# Altium PCB AT_START_WB415_V1.1.pcbdoc (part 2 of 2)
Units mil, origin at the board's own origin, x right, y up, seen from the top; angles counter-clockwise.
Board outline 4474.57 x 4041.5 mil, 2 copper layers (Top Layer, Bottom Layer); 120 components, 101 nets, 415 pads, 791 vias.
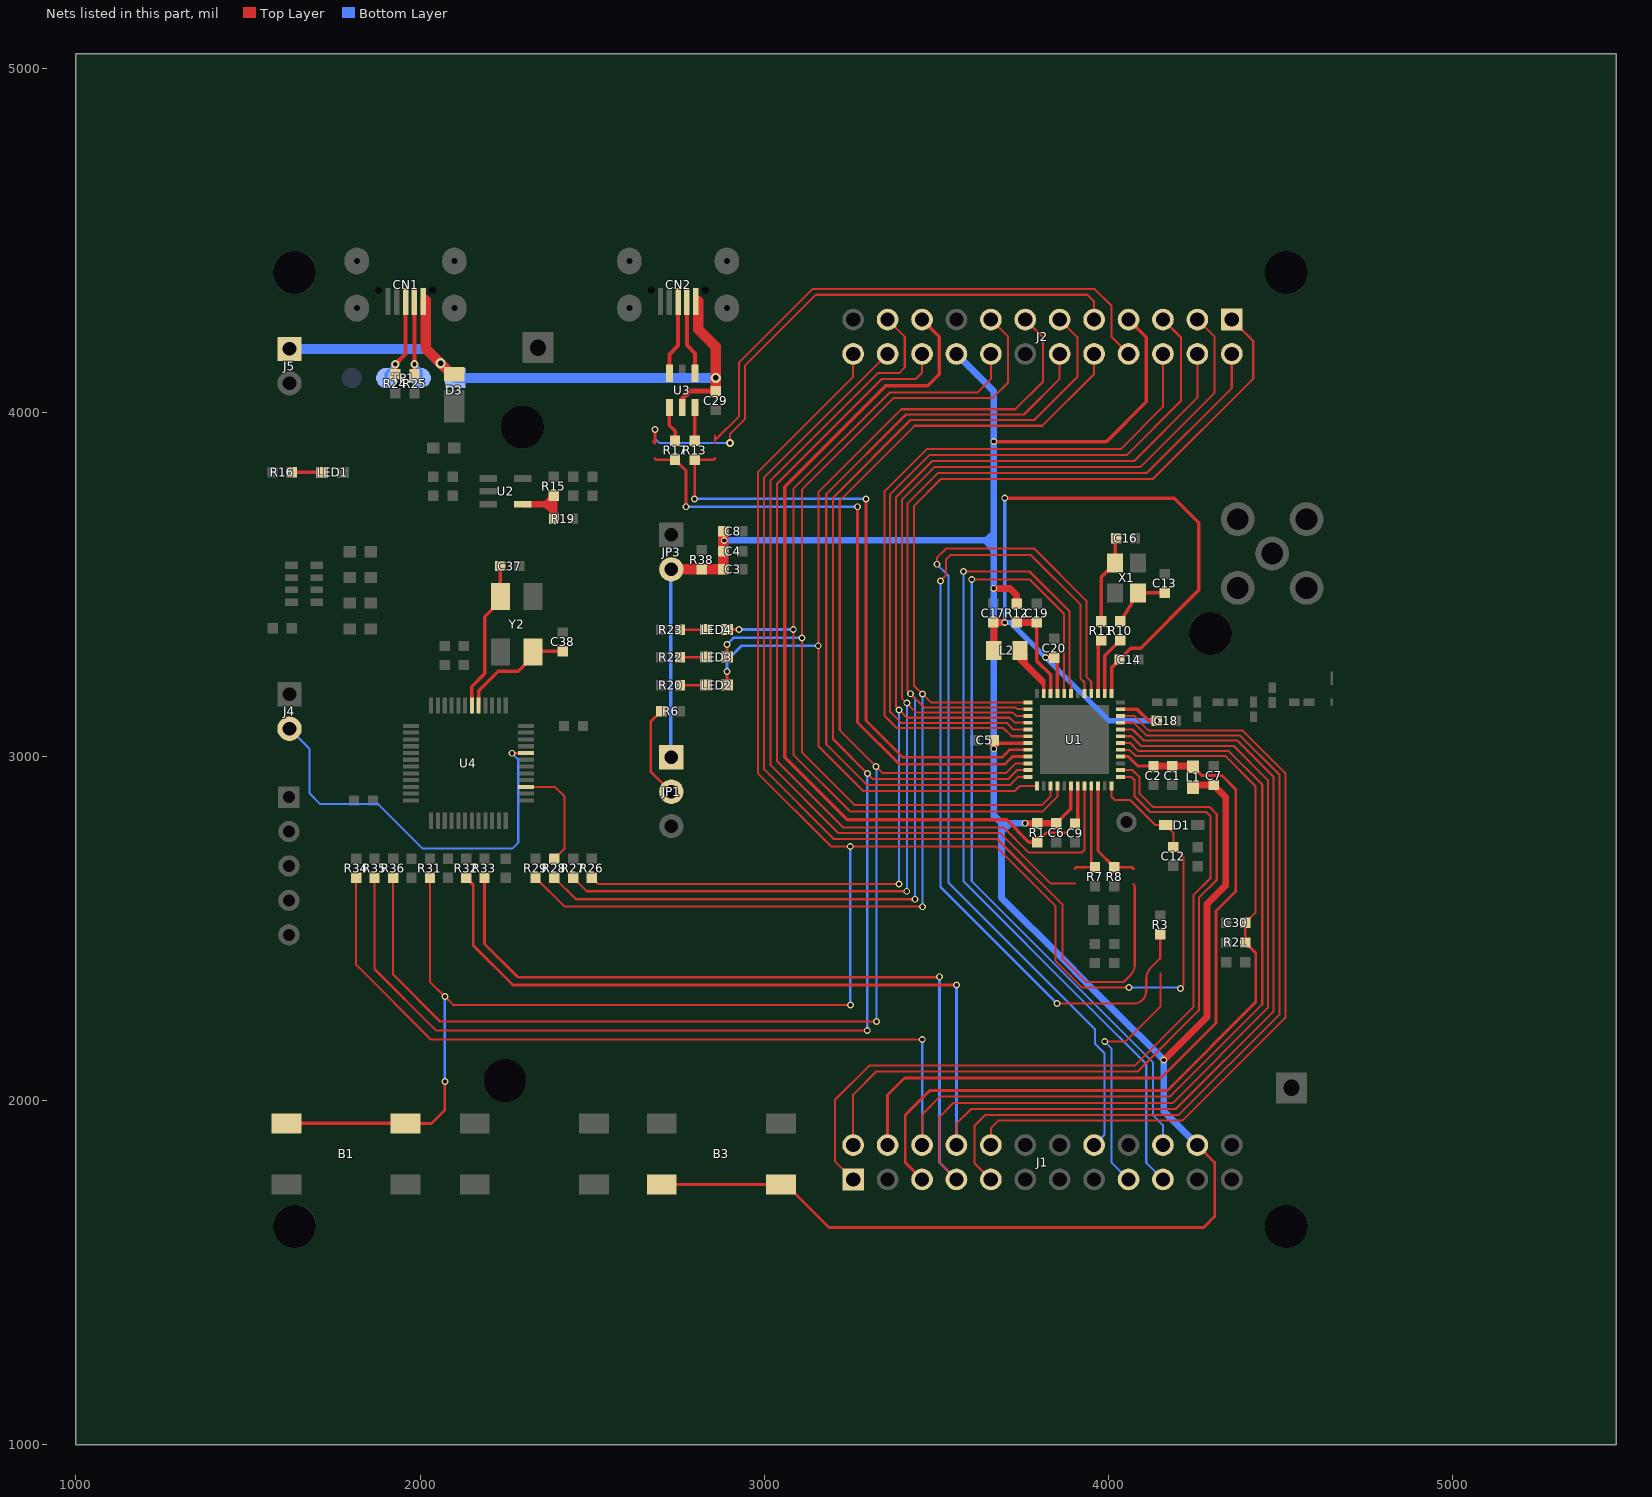
[diagram p2: the nets of this part, all layers, seen from the top]

## Via types
v1: diameter 20, hole 12, Top Layer to Bottom Layer, tented both sides, 769 vias
v2: diameter 24, hole 12, Top Layer to Bottom Layer, tented both sides, 20 vias
v3: diameter 30, hole 16, Top Layer to Bottom Layer, tented both sides, 2 vias

## Nets (pads, with @x,y where several pads share a name; then routed paths per layer and width w, separated by ;. In a path a pad name is that pad's centre, name@x,y a point inside that pad or via, vN(x,y) a via of type N, cw(c..) or ccw(c..) an arc to the next point about the centre after c; other vN are vias at no path point) (continued)
M_SCK: R28.2 U4.39 | length 316.3
  Top Layer w6: U4.39@2307.72,2912.08 2391.59,2912.08 2419.37,2884.3 2419.37,2732.59 R28.2@2390.07,2703.29
MCU_NRST: B1.1 B1.3 C12.2 D1.1 J2.24 R31.1 U1.48 | length 6453.4
  Top Layer w6: R31.1@2028.37,2646.9 2028.37,2346.4 v1(2071.77,2303) 2095.97,2278.8 v1(3249.87,2278.8) ; J2.24@3258.15,4170 3258.16,4103.19 2981.17,3826.2 2981.17,2951.8 3193.77,2739.2 v1(3249.57,2739.2) 3672.57,2739.2 3846.37,2565.4 3846.37,2405.6 3922.37,2329.6 v1(4059.77,2329.6) ; U1.48@4008.94,2915.13 4008.94,2882.63 4017.57,2874 4063.57,2874 4136.57,2801 D1.1@4166.42,2801 4188.57,2778.84 C12.2@4188.57,2737.5 4217.27,2708.8 4217.27,2334.8 v1(4208.67,2326.2)
  Top Layer w8: B1.3@1957.76,1934.14 2032.71,1934.14 2071.67,1973.1 v1(2071.67,2056.3)
  Top Layer w10: B1.1@1611.3,1934.14 B1.3@1957.76,1934.14
  Bottom Layer w6: v1(3249.57,2739.2) 3249.57,2279.1 v1(3249.87,2278.8) ; v1(4059.77,2329.6) 4205.27,2329.6 v1(4208.67,2326.2)
  Bottom Layer w8: v1(2071.67,2056.3) 2071.77,2056.4 v1(2071.77,2303)
P04/BLE_MOSI: J2.4 R26.1 U1.28 | length 3544.3
  Top Layer w6: R26.1@2498.57,2648.29 2517.06,2629.8 v1(3391.57,2629.8) ; U1.28@3766.52,3098.5 3727.07,3098.5 3712.57,3113 3414.47,3113 v1(3391.67,3135.8) 3382.57,3144.9 3382.57,3754 3487.27,3858.7 4074.07,3858.7 4258.15,4042.79 J2.4@4258.15,4170
  Top Layer w8: v1(3391.57,2629.8) 3393.07,2629.8 v1@3394.07,2630.8
  Bottom Layer w6: v1(3391.57,2629.8) 3391.67,2629.9 v1(3391.67,3135.8)
P05/BLE_MISO: J2.3 R27.1 U1.27 | length 3768.4
  Top Layer w6: R27.1@2444.47,2648.29 2483.86,2608.9 v1(3413.67,2608.9) ; U1.27@3766.52,3118.19 3731.38,3118.19 3721.57,3128 3441.37,3128 v1(3413.97,3155.4) 3399.57,3169.8 3399.57,3746 3495.27,3841.7 4093.27,3841.7 4308.57,4057 4308.57,4219.59 J2.3@4258.15,4270
  Bottom Layer w6: v1(3413.67,2608.9) 3413.97,2609.2 v1(3413.97,3155.4)
P06/BLE_SCK: J2.2 R28.1 U1.26 | length 3772.5
  Top Layer w6: R28.1@2390.07,2648.29 2452.86,2585.5 v1(3437.27,2585.5) ; U1.26@3766.52,3137.87 3734.7,3137.87 3729.57,3143 3464.07,3143 v1(3424.47,3182.6) 3416.57,3190.5 3416.57,3736 3504.87,3824.3 4111.97,3824.3 4358.15,4070.49 J2.2@4358.15,4170
  Bottom Layer w6: v1(3424.47,3182.6) 3437.27,3169.8 v1(3437.27,2585.5)
P07/BLE_NSS: J2.1 R29.1 U1.25 | length 3988.6
  Top Layer w6: R29.1@2335.27,2648.29 2419.66,2563.9 v1(3459.57,2563.9) ; U1.25@3766.52,3157.56 3483.71,3157.56 v1(3459.87,3181.4) 3434.57,3206.7 3434.57,3728 3513.07,3806.5 4129.07,3806.5 4420.57,4098 4420.57,4207.59 J2.1@4358.15,4270
  Bottom Layer w6: v1(3459.87,3181.4) 3459.87,2564.2 v1(3459.57,2563.9) v1@3460.57,2563.9
P14: R3.2 U1.17 | length 2615
  Top Layer w6: v1(3511.97,3510.5) 3527.87,3526.4 3527.87,3573.2 3539.97,3585.3 3774.87,3585.3 3919.07,3441.1 3919.07,3226.5 3930.2,3215.37 U1.17@3930.2,3183.44 ; v1(3850.37,2282.7) 4073.52,2282.7 ccw(c4073.52,2318.55) 4098.87,2293.2 ccw(c4072.79,2319.27) 4109.67,2319.27 4109.67,2354.7 cw(c4155.01,2354.7) 4122.95,2386.76 4150.67,2414.48
  Top Layer w8: 4150.67,2414.48 R3.2@4150.67,2483.5
  Bottom Layer w6: v1(3511.97,3510.5) 3511.97,2621.1 v1(3850.37,2282.7)
P14*: J1.17 | length 728.9
  Top Layer w6: v1(3989.17,2171.8) 4048.67,2171.8 4150.67,2273.8 4150.67,2370.08
  Bottom Layer w6: v1(3989.17,2171.8) 4008.47,2152.5 4008.47,1821.14 J1.17@4058.15,1771.46
P16/BLE_TX2: J1.20 U1.20 | length 2414.9
  Top Layer w6: v1(3602.57,3515) 3770.57,3515 3871.14,3414.43 U1.20@3871.14,3183.44
  Bottom Layer w6: v1(3602.57,3515) 3602.57,2638 4129.57,2111 4129.57,1958 4158.15,1929.42 J1.20@4158.15,1871.46
P17/BLE_RX2: J1.19 U1.19 | length 2603
  Top Layer w6: v1(3578.57,3538) 3770.57,3538 3886.57,3422 3886.57,3217.3 3890.83,3213.04 U1.19@3890.83,3183.44
  Bottom Layer w6: v1(3578.57,3538) 3578.57,2638 3950.31,2266.26 4109.57,2107 4109.57,1910.62 4109.57,1820.04 J1.19@4158.15,1771.46
P31: J1.16 U1.16 | length 2704.1
  Top Layer w6: v1(3501.27,3559) 3501.27,3577.6 3528.27,3604.6 3783.97,3604.6 3935.57,3453 3935.57,3232 3949.88,3217.69 U1.16@3949.88,3183.44
  Bottom Layer w6: v1(3501.27,3559) 3535.57,3524.7 3535.57,2632.7 3960.67,2207.6 3960.67,2165.9 3988.27,2138.3 3988.27,1901.58 J1.16@3958.15,1871.46
PA0: C30.2 J1.5 R21.1 U1.5 | length 2449.3
  Top Layer w6: U1.5@4034.82,3019.76 4060.81,3019.76 4078.57,3002 4339.17,3002 4426.57,2914.6 4426.57,2546.1 C30.2@4398.17,2517.7
  Top Layer w8: J1.5@3458.15,1771.46 3409.47,1820.14 3409.47,1958.8 3480.67,2030 4171.07,2030 4427.87,2286.8 4427.87,2429.4 R21.1@4397.27,2460 C30.2@4397.27,2517.7
PA1: J1.6 R34.1 U1.6 | length 4605.7
  Top Layer w6: R34.1@1813.97,2648.7 1813.97,2395 2030.77,2178.2 v1(3458.77,2178.2) ; J1.6@3458.15,1871.46 3458.15,1959.78 3511.37,2013 4179.57,2013 4446.67,2280.1 4446.67,2918.9 4349.57,3016 4086.57,3016 4063.12,3039.45 U1.6@4034.82,3039.45
  Bottom Layer w8: J1.6@3458.57,1871 3458.77,1871.2 v1(3458.77,2178.2)
PA2/MCU_TX2: J1.7 R33.1 U1.7 | length 4595.7
  Top Layer w6: J1.7@3558.15,1771.46 3509.27,1820.34 3509.27,1954.1 3548.17,1993 3616,1993 4186.27,1993 4463.07,2269.8 4463.07,2931.3 4363.47,3030.9 4095.07,3030.9 4066.84,3059.13 U1.7@4034.82,3059.13
  Top Layer w8: R33.1@2186.87,2648.3 2186.87,2455.8 2283.57,2359.1 3509.07,2359.1 v1(3509.07,2360.5)
  Bottom Layer w8: v1(3509.07,2360.5) 3509.07,1820.54 J1.7@3558.15,1771.46
PA3/MCU_RX2: J1.8 R32.1 U1.8 | length 4422.9
  Top Layer w6: J1.8@3558.15,1871.46 3558.15,1932.88 3601.37,1976.1 4195.17,1976.1 4479.67,2260.6 4479.67,2940.7 4373.67,3046.7 4101.97,3046.7 4069.85,3078.82 U1.8@4034.82,3078.82
  Top Layer w8: R32.1@2133.57,2648.3 2154.17,2627.7 2154.17,2451.2 2269.17,2336.2 v1(3558.17,2336.2)
  Bottom Layer w8: J1.8@3558.15,1871.46 v1(3558.17,2336.2)
PA4: J1.9 U1.9 | length 2414.5
  Top Layer w6: J1.9@3658.15,1771.46 3610.57,1819.04 3610.57,1927 3642.57,1959 4204.57,1959 4497.07,2251.5 4497.07,2946.5 4382.57,3061 4110.57,3061 4073.26,3098.31 U1.9@4036.57,3098.31
PA5: J1.10 U1.10 | length 2295.4
  Top Layer w6: J1.10@3658.15,1871.46 3658.15,1919.78 3681.47,1943.1 4215.57,1943.1 4513.67,2241.2 4513.67,2951.9 4390.07,3075.5 4117.07,3075.5 4074.38,3118.19 U1.10@4034.82,3118.19
PA11*: J2.8 | length 1636.8
  Top Layer w6: 2856.57,3932.77 2856.57,3910.77 2856.57,3919 2926.57,3989 2926.57,4145.7 3139.37,4358.5 3960.17,4358.5 4008.57,4310.1 4008.57,4219.59 J2.8@4058.15,4170
PA11/USB_D-: R13.1 U1.32 | length 1840.3
  Top Layer w8: v1(2797.57,3749) R13.1@2797.57,3862.5 2852.7,3862.5 2856.57,3866.37 ; v1(3295.57,3749) 3295.57,3105.2 3402.77,2998 3690.57,2998 3712.33,3019.76 U1.32@3766.52,3019.76
  Bottom Layer w8: v1(2797.57,3749) v1(3295.57,3749)
PA12*: J2.9 | length 1698.8
  Top Layer w6: v2(2900.57,3911) 2900.57,3937.6 2943.57,3980.6 2943.57,4136 3149.57,4342 3938.57,4342 3958.16,4322.41 J2.9@3958.15,4270
  Top Layer w8: 2678.34,3915 2682.57,3910.77 ; 2682.57,3910.78 v1(2682.57,3950.5)
  Bottom Layer w6: v1(2682.57,3950.5) 2682.57,3924 2695.57,3911 v2(2900.57,3911)
PA12/USB_D+: R17.1 U1.33 | length 1889.4
  Top Layer w8: 2682.57,3866.38 2686.45,3862.5 R17.1@2740.57,3862.5 2772.57,3830.5 v1(2772.57,3726) ; v1(3270.57,3726) 3270.57,3099.3 3391.87,2978 3699.57,2978 3721.65,3000.08 U1.33@3766.52,3000.07
  Bottom Layer w8: v1(2772.57,3726) v1(3270.57,3726)
PA13/SWDIO: J2.10 R36.1 U1.34 | length 4709.6
  Top Layer w6: R36.1@1921.37,2648.3 1921.37,2366.9 2057.77,2230.5 v1(3325.67,2230.5) ; U1.34@3766.52,2980.39 3729.96,2980.39 3702.57,2953 3342.87,2953 3219.17,3076.7 3219.17,3743.8 3436.67,3961.3 3807.67,3961.3 3958.16,4111.79 J2.10@3958.15,4170
  Bottom Layer w6: v1(3324.97,2971) 3325.67,2970.3 v1(3325.67,2230.5)
PA14/SWCLK: J2.11 R35.1 U1.35 | length 4889.7
  Top Layer w6: R35.1@1867.47,2648.4 1867.47,2382.9 2046.67,2203.7 v1(3298.97,2203.7) ; U1.35@3766.52,2960.7 3734.28,2960.71 3708.57,2935 3315.57,2935 3199.47,3051.1 3199.47,3752.7 3424.67,3977.9 3784.57,3977.9 3909.57,4102.9 3909.57,4218.59 J2.11@3858.15,4270
  Bottom Layer w6: v1(3298.97,2203.7) 3298.97,2950.4 v1(3299.57,2951)
PB6/PC12: J2.12 U1.36 | length 2261.1
  Top Layer w6: U1.36@3766.52,2941.02 3737.59,2941.02 3714.57,2918 3297.37,2918 3179.97,3035.4 3179.97,3762.3 3411.57,3993.9 3754.47,3993.9 3858.16,4097.59 J2.12@3858.15,4170
PB7: J2.13 LED2.2 U1.37 | length 2775.3
  Top Layer w6: J2.13@3758.15,4270 3809.57,4218.59 3809.57,4089.4 3729.37,4009.2 3398.27,4009.2 3156.87,3767.8 3156.87,3030.7 3287.57,2900 3727.57,2900 3742.71,2915.14 U1.37@3792.4,2915.13
  Top Layer w7.87: v1(2891.27,3247.2) LED2.2@2891.53,3207.9
  Bottom Layer w7.87: v1(2891.27,3247.2) 2891.27,3279.4 2893.97,3282.1 2933.97,3322.1 v1(3156.57,3322.1)
PB8: J2.15 LED3.2 U1.39 | length 2784.5
  Top Layer w6: J2.15@3658.15,4270 3708.57,4219.59 3708.57,4087 3663.97,4042.4 3376.47,4042.4 3109.27,3775.2 3109.27,3012.8 3263.07,2859 3805.87,2859 3831.77,2884.9 U1.39@3831.77,2915.13
  Top Layer w7.87: v1(2891.37,3326) LED3.2@2891.53,3289
  Bottom Layer w7.87: v1(2891.37,3326) 2910.37,3345 v1(3109.07,3345)
PB9: J2.16 LED4.2 U1.40 | length 2629.1
  Top Layer w6: J2.16@3658.15,4170 3658.16,4096.59 3619.87,4058.3 3365.07,4058.3 3084.57,3777.8 3084.57,3005.9 3250.47,2840 3807.87,2840 3851.46,2883.59 U1.40@3851.46,2915.13
  Top Layer w7.87: LED4.2@2891.53,3368.9 2891.93,3369.3 v1(2926.27,3369.3)
  Bottom Layer w7.87: v1(2926.27,3369.3) 3083.77,3369.3 v1(3084.17,3368.9)
PB14: J2.5 U1.29 | length 2269.6
  Top Layer w6: U1.29@3766.52,3078.82 3723.75,3078.82 3704.57,3098 3397.57,3098 3365.57,3130 3365.57,3762 3479.57,3876 4052.67,3876 4210.57,4033.9 4210.57,4217.59 J2.5@4158.15,4270
PB15/PA8: J2.6 U1.30 | length 2158.4
  Top Layer w6: U1.30@3766.52,3059.13 3718.44,3059.13 3694.57,3083 3384.57,3083 3349.57,3118 3349.57,3771 3472.07,3893.5 4035.57,3893.5 4158.15,4016.09 J2.6@4158.15,4170
PC0: J1.1 U1.1 | length 2318
  Top Layer w6: J1.1@3258.15,1771.46 3204.77,1824.84 3204.77,2002.2 3304.57,2102 4076.57,2102 4247.57,2273 4247.57,2598.4 4296.57,2647.4 4296.57,2826 4283.57,2839 4121.57,2839 4075.57,2885 4075.57,2932 4066.55,2941.02 U1.1@4034.82,2941.02
PC1: J1.2 U1.2 | length 2205.1
  Top Layer w6: J1.2@3258.15,1871.46 3258.15,2018.08 3325.07,2085 4085.07,2085 4262.57,2262.5 4262.57,2589.5 4314.57,2641.5 4314.57,2833 4293.57,2854 4128.57,2854 4090.57,2892 4090.57,2940 4069.86,2960.71 U1.2@4034.82,2960.7
PC13: J2.20 U1.44 | length 2608.8
  Top Layer w6: J2.20@3458.15,4170 3458.16,4115.79 3439.27,4096.9 3340.37,4096.9 3036.77,3793.3 3036.77,2986.5 3228.67,2794.6 3694.97,2794.6 3768.77,2720.8 3921.67,2720.8 3930.2,2729.33 U1.44@3930.2,2915.13
PC14*: J2.21 | length 2540.4
  Top Layer w6: J2.21@3358.15,4270 3408.07,4220.09 3408.07,4130.9 3391.57,4114.4 3329.87,4114.4 3018.17,3802.7 3018.17,2974.9 3215.47,2777.6 3684.97,2777.6 3831.85,2630.72 3902.57,2630.72
PC14/LEXT_IN: R7.1 U1.45 | length 313.8
  Top Layer w8: 3902.57,2675.12 3905.95,2678.5 R7.1@3960.57,2678.5 ; U1.45@3949.88,2915.13 3949.88,2689.18 R7.1@3960.57,2678.5 ; R7.1@3951.88,2688.19 3960.57,2679.5 R7.1@3960.57,2678.5
PC15*: J2.22 | length 3045.5
  Top Layer w6: J2.22@3358.15,4170 2999.57,3811.41 2999.57,2962.8 3201.77,2760.6 3676.07,2760.6 3866.57,2570.1 3866.57,2412.5 3933.37,2345.7 4044.87,2345.7 4064.57,2365.6 ; 4064.24,2365.29 ccw(c4035.93,2393.6) 4075.97,2393.6 ; 4072.57,2629.71 cw(c4063.88,2621.02) 4076.17,2621.02 4076.17,2399.55 4076.17,2393.58
PC15/LEXT_OUT: R8.1 U1.46 | length 313.9
  Top Layer w8: U1.46@3969.57,2915.13 3969.57,2725.49 R8.1@4016.57,2678.5 4068.18,2678.5 4072.57,2674.11
R6_1: JP1.2 R6.1 | length 270.5
  Top Layer w7.87: R6.1@2700.08,3131.7 2669.67,3101.29 2669.67,2956.8 JP1.2@2728.37,2898.1
R16_2: LED1.1 R16.2 | length 87.7
  Top Layer w10: R16.2@1627.17,3826.4 LED1.1@1714.83,3825.6
R19_2: R15.1 R19.2 U2.4 | length 221.4
  Top Layer w20: U2.4@2298.07,3733.1 2363.76,3733.1 ; 2363.76,3733.1 R15.1@2388.47,3757.8 R19.2@2388.97,3690.8 2388.57,3712 2363.76,3733.1
R20_1: LED2.1 R20.1 | length 75.5
  Top Layer w7.87: R20.1@2755.08,3207.7 LED2.1@2830.53,3207.9
R22_1: LED3.1 R22.1 | length 75.5
  Top Layer w7.87: R22.1@2755.08,3288.8 LED3.1@2830.53,3289
R23_1: LED4.1 R23.1 | length 75.5
  Top Layer w7.87: R23.1@2755.08,3368.7 LED4.1@2830.53,3368.9
U1_23: L2.1 U1.23 | length 200.8
  Top Layer w10: 3759.9,3266.53 L2.1@3759.9,3295.67 ; 3799.05,3220.16 3811.87,3207.4 ; 3807.07,3219.3 3811.87,3214.2 U1.23@3812.09,3183.44
  Top Layer w20: L2.1@3742.91,3308.5 3742.91,3283.46 3807.07,3219.3
U3_1: CN2.2 U3.1 | length 218.5
  Top Layer w12: CN2.2@2775.16,4322.6 2775.16,4195.41 2798.97,4171.6 U3.1@2798.97,4114
U3_3: CN2.3 U3.3 | length 219.1
  Top Layer w12: U3.3@2724.17,4114 2724.17,4168.6 2749.57,4194 CN2.3@2749.57,4322.6
U3_4: R17.2 U3.4 | length 103.3
  Top Layer w10: U3.4@2724.17,4014 2724.17,3962.4 2740.57,3946 R17.2@2740.57,3917.5
U3_6: R13.2 U3.6 | length 97.1
  Top Layer w10: R13.2@2797.57,3917.5 2797.57,4012.6 U3.6@2798.97,4014
U4_5: C38.1 U4.5 Y2.1 | length 342.8
  Top Layer w10: U4.5@2169.93,3148.3 2169.9,3191.58 2226.32,3248 2285.37,3248 2327.37,3290 Y2.1@2327.38,3303.79 2329.39,3305.81 C38.1@2413.97,3305.8
U4_6: C37.2 U4.6 Y2.3 | length 439.8
  Top Layer w10: U4.6@2150.24,3148.3 2150.21,3203.39 2188.27,3241.45 2188.27,3406.8 2232.89,3451.42 Y2.3@2232.89,3465.21 C37.2@2232.95,3553.79
U4_44: J4.2 U4.44 | length 1200.3
  Top Layer w8: v1(2266.57,3009.8) 2307.03,3009.8 U4.44@2307.73,3010.5
  Bottom Layer w6: J4.2@1620.37,3081.1 1678.47,3023 1678.47,2893.4 1710.17,2861.7 1878.37,2861.7 2006.57,2733.5 2268.57,2733.5 2285.07,2750 2285.07,2991.3 v1(2266.57,3009.8)
USB+: CN1.3 R24.1 TP1.3 | length 275.4
  Top Layer w12: R24.1@1927.57,4110.5 v2(1927.57,4140) 1957.76,4170.19 CN1.3@1957.75,4322.6
  Bottom Layer w10: TP1.3@1901.57,4100 1901.57,4114 v2(1927.57,4140)
USB-: CN1.2 R25.1 TP1.2 | length 259
  Top Layer w12: CN1.2@1983.34,4322.6 R25.1@1983.57,4111.1
  Bottom Layer w10: v2(1983.57,4140) 2001.57,4122 TP1.2@2001.57,4100
VBAT: C9.1 J2.19 R1.1 U1.43 | length 2645.6
  Top Layer w8: R1.1@3792.57,2751.5 3820.07,2779 3876.07,2779 C9.1@3902.57,2805.5
  Top Layer w10: J2.19@3458.15,4270 3508.57,4219.59 3508.57,4110.9 3475.27,4077.6 3352.57,4077.6 3059.17,3784.2 3059.17,2997.6 3240.67,2816.1 3703.97,2816.1 3768.57,2751.5 R1.1@3792.57,2751.5 ; U1.43@3910.51,2915.13 3910.51,2813.44 C9.1@3902.57,2805.5 3903.57,2805.5 C9.1@3912.51,2814.44
VBUS: C29.2 CN1.1 CN2.1 D3.2 J5.1 TP1.1 U3.5 | length 1944
  Top Layer w15: U3.5@2761.57,4014 2761.57,4039.5 2784.07,4062 C29.2@2858.87,4062
  Top Layer w30: CN1.1@2016.17,4326.9 2016.17,4185.7 v3(2059.17,4142.7) 2090.62,4111.25 D3.2@2099.52,4111.25 ; CN2.1@2808.07,4323.9 2808.07,4241.2 2858.87,4190.4 C29.2@2858.87,4062
  Bottom Layer w30: J5.1@1620.37,4184.4 2017.17,4184.4 TP1.1@2101.57,4100 v3@2858.97,4100
  other v3: 2858.87,4100.1
VCC_1V5: C14.2 C17.2 C18.1 C20.2 L2.2 U1.11 U1.13 U1.21 | length 2498.1
  Top Layer w10: v1(3698.57,3751) 4190.57,3751 4262.57,3679 4262.57,3484 4093.57,3315 4065.07,3315 C14.2@4032.07,3282 4008.94,3258.87 U1.13@4008.94,3183.44 ; C20.2@3842.57,3287.5 3851.46,3278.61 U1.21@3851.46,3183.44 ; U1.11@4034.82,3137.87 4082.7,3137.87 4116.57,3104 v1(4139.57,3104)
  Top Layer w15: v1(3817.57,3288) 3842.07,3288 C20.2@3842.57,3287.5
  Top Layer w20: L2.2@3666.83,3308.5 3666.83,3388.24 C17.2@3665.57,3389.5 3698.07,3389.5 v1(3698.57,3390)
  Bottom Layer w10: v1(3698.57,3390) v1(3698.57,3751)
  Bottom Layer w15: v1(3698.57,3390) 3715.57,3390 v1(3817.57,3288) 4001.57,3104 v1(4139.57,3104)
VDD: B3.1 B3.3 C3.1 C4.1 C5.1 C6.1 C7.1 C8.1 J1.22 J2.7 J2.18 JP1.1 JP3.2 L1.1 R1.2 R12.1 R38.2 U1.31 U1.42 | length 8421.8
  Top Layer w7.87: B3.3@2701.84,1757.02 B3.1@3048.29,1757.02 3062.46,1757.01 3187.87,1631.6 4276.67,1631.6 4308.37,1663.3 4308.37,1821.24 J1.22@4258.15,1871.46
  Top Layer w10: v1(3666.67,3915.1) 3994.17,3915.1 4109.57,4030.5 4109.57,4218.59 J2.7@4058.15,4270 ; C5.1@3667.07,3048 3667.07,3023.5 v1(3666.57,3023) 3683.02,3039.45 U1.31@3766.52,3039.45 ; C6.1@3848.57,2806.5 3890.83,2848.76 U1.42@3890.83,2915.13
  Top Layer w20: v1(3666.57,3023) 3666.57,3047.5 C5.1@3667.07,3048 ; v1(3666.57,3489) 3713.57,3489 3732.57,3470 R12.1@3732.57,3444.5 ; v1(3757.57,2806.5) R1.2@3792.57,2806.5 C6.1@3848.57,2806.5 ; v1(4160.57,2118) 4286.57,2244 4286.57,2572 4340.57,2626 4340.57,2882.5 C7.1@4305.57,2917.5 4253.38,2917.5 L1.1@4245.57,2909.69
  Top Layer w30: JP3.2@2729.87,3544.1 R38.2@2817.77,3544.7 C3.1@2878.27,3544.7 ; C3.1@2881.02,3544.7 C8.1@2881.02,3654.5
  Bottom Layer w10: JP1.1@2728.37,2998.1 2728.37,3542.6 JP3.2@2729.87,3544.1
  Bottom Layer w20: v1(2883.47,3627.8) 2884.37,3628.7 3665.67,3628.7 ; J2.18@3558.15,4170 3666.67,4061.49 v1(3666.67,3915.1) 3666.57,3915 v1(3666.57,3489) v1(3666.57,3023) 3666.57,2829 3689.07,2806.5 ; 3643.97,3626.9 3666.55,3600.4 ; 3643.97,3627.75 3666.56,3648.25 ; 3689.07,2782.72 3713.57,2806.5 3713.86,2806.5 ; v1(3757.57,2806.5) 3689.07,2806.5 ; J1.22@4258.15,1871.46 4160.57,1969.04 v1(4160.57,2118) 4011.81,2266.76 3787.31,2491.26 3773.67,2504.9 3773.67,2505.3 3689.07,2589.9 3689.07,2806.5
VDDA: C1.2 C2.2 J1.4 L1.2 U1.4 | length 2278.2
  Top Layer w8: J1.4@3358.15,1871.46 3358.15,2016.58 3407.57,2066 4152.57,2066 4312.57,2226 4312.57,2550.9 4369.57,2607.9 4369.57,2905.1 4329.67,2945 4270.89,2945 L1.2@4245.57,2970.32 L1.2@4243.39,2972.5 ; U1.4@4034.82,3000.07 4057.49,3000.08 4085.07,2972.5 C2.2@4130.57,2972.5
  Top Layer w10: C2.2@4122.07,2981 C2.2@4130.57,2972.5
  Top Layer w20: C2.2@4130.57,2972.5 C1.2@4185.57,2972.5 4243.39,2972.5 L1.2@4245.57,2970.32
VDDBAT: C19.1 R12.2 U1.22 | length 280.7
  Top Layer w10: C19.1@3791.57,3389.5 3791.57,3277.8 3831.77,3237.6 U1.22@3831.77,3183.44
  Top Layer w20: R12.2@3733.57,3389.5 C19.1@3791.57,3389.5
X1_1: C13.2 R10.2 X1.1 | length 175
  Top Layer w10: R10.2@4034.57,3393 X1.1@4086.03,3475.69 4163.38,3475.69 C13.2@4163.57,3475.5
X1_3: C16.2 R11.2 X1.3 | length 258.5
  Top Layer w10: R11.2@3978.57,3393.5 3978.57,3521.78 X1.3@4019.1,3562.31 4019.1,3631.03 C16.2@4022.07,3634
XTALI: R11.1 U1.15 | length 158.3
  Top Layer w10: U1.15@3969.57,3183.44 3969.57,3329 R11.1@3978.57,3338
XTALO: R10.1 U1.14 | length 173.3
  Top Layer w10: U1.14@3989.25,3183.44 3989.25,3292.68 R10.1@4034.57,3338
pads on no net: CN1.4 CN1.MH1 CN1.MH2 CN2.4 CN2.MH1 CN2.MH2 J1.11 J1.12 J1.13 J1.14 J1.15 J1.21 J1.23 J2.23 U4.2 U4.3 U4.4 U4.14 U4.15 U4.16 U4.17 U4.18 U4.21 U4.22 U4.42 U4.43 U4.45 U4.46

## Polygon pours and split planes (outlines as drawn)
GND on Bottom Layer (solid): 1509.37,4539.8 4619.77,4539.8 4628.57,4531 4628.57,1505.7 4627.77,1504.9 1549.87,1504.9 1503.67,1551.1 1503.67,4534.2 1507.37,4537.9
GND on Top Layer (solid): 1525.67,4537.8 4622.47,4537.8 4628.47,4531.8 4628.47,1511.5 4629.47,1510.5 1543.27,1510.5 1507.47,1546.3 1507.47,4530.8 1511.47,4534.8

## Keep-outs
Keep-Out Layer:
  lines w10: 1504.94,1589.21 ccw(c1587.69,1587.76) 1587.68,1505 ; 1505.02,4452.51 cw(c1587.69,4453.82) 1587.68,4536.5 ; 4886.89,1505 ccw(c4886.89,1587.76) 4969.63,1589.21 ; 4886.9,4536.5 cw(c4886.9,4453.82) 4969.57,4452.51

## Other copper
Top Layer:
  drawing of 424 lines, arcs and shapes, not listed
Bottom Layer:
  region net VBUS: 2072.04,4076.5 2125.07,4129.53 2077.34,4145.44 2056.13,4124.22
  region net 3V3: 1649.57,2886.66 1614.21,2851.3 1646.03,2840.69 1660.17,2854.84
  region net VDD: 2715.87,3033.53 2740.87,3033.53 2733.37,3048.53 2723.37,3048.53
  region net PB7: 2883.77,3253.81 2898.77,3253.81 2895.2,3260.81 2887.33,3260.81
  region net PB8: 2901.35,3325.37 2890.74,3335.98 2898.21,3338.41 2903.78,3332.84
  region net PB9: 2932.88,3361.8 2932.88,3376.8 2939.88,3373.24 2939.88,3365.36
  region net BLE_NRST: 2144.27,2015.16 2126.28,2014.71 2132.07,2023.26 2138.07,2023.41
  region net BLE_NRST: 2116.14,2349.35 2103.42,2336.62 2113.6,2334.93 2117.84,2339.17
  region net B3_2: 3143.1,1997.6 3143.1,2015.6 3151.5,2010.6 3151.5,2002.6
  region net B3_2: 3391.23,1997.6 3391.23,2015.6 3382.83,2010.6 3382.83,2002.6
  region net M-NRST: 2242.65,3009.97 2232.04,3020.58 2240.17,3022.35 2244.42,3018.11
  region net U4_44: 2276.55,3010.43 2265.94,2999.82 2274.07,2998.05 2278.32,3002.29
  region net MCU_NRST: 4204.14,2335.11 4200.39,2320.59 4194.71,2326.6 4196.26,2332.6
  region net MCU_NRST: 4066.38,2322.1 4066.38,2337.1 4073.38,2332.6 4073.38,2326.6
  region net PA2/MCU_TX2: 3501.57,2353.89 3516.57,2353.89 3513.07,2346.89 3505.07,2346.89
  region net PA3/MCU_RX2: 3565.67,2329.59 3550.67,2329.59 3554.17,2322.59 3562.17,2322.59
  region net P14: 3850.99,2292.68 3840.39,2282.07 3838.62,2290.21 3842.86,2294.45
  region net P14: 3504.47,3503.89 3519.47,3503.89 3514.97,3496.89 3508.97,3496.89
  region net P14*: 3999.15,2172.43 3988.54,2161.82 3996.67,2160.05 4000.92,2164.29
  region net BLE_NRST: 4042.55,2123.63 4031.94,2113.02 4040.07,2111.25 4044.32,2115.49
  region net BLE_NRST: 4025.07,2129.61 4040.07,2129.61 4035.57,2136.61 4029.57,2136.61
  region net VCC_1V5: 3691.07,3744.39 3706.07,3744.39 3703.57,3737.39 3693.57,3737.39
  region net VCC_1V5: 3691.07,3396.61 3706.07,3396.61 3703.57,3403.61 3693.57,3403.61
  region net VCC_1V5: 3705.18,3382.5 3705.18,3397.5 3712.18,3397.5 3712.18,3382.5
  region net VCC_1V5: 3818.19,3297.98 3807.59,3287.37 3802.64,3292.32 3813.24,3302.93
  region net VCC_1V5: 3827.55,3288.63 3816.94,3278.02 3821.89,3273.07 3832.5,3283.68
  region net PA11/USB_D-: 2804.18,3741.5 2804.18,3756.5 2811.18,3753 2811.18,3745
  region net PA12/USB_D+: 2779.18,3718.5 2779.18,3733.5 2786.18,3730 2786.18,3722
  region net PA11/USB_D-: 3288.95,3741.5 3288.95,3756.5 3281.95,3753 3281.95,3745
  region net PA12/USB_D+: 3263.95,3718.5 3263.95,3733.5 3256.95,3730 3256.95,3722
  region net MCU_NRST: 3242.07,2732.59 3257.07,2732.59 3252.57,2725.59 3246.57,2725.59
  region net MCU_NRST: 3257.22,2285.58 3242.22,2285.25 3246.57,2292.34 3252.57,2292.48
  region net BOOT0: 3284.06,2671.31 3269.06,2670.87 3273.77,2664 3279.77,2664.18
  region net BOOT0: 3284.06,2684.09 3269.06,2684.53 3273.77,2691.4 3279.77,2691.22
  region net PB7: 3149.95,3314.6 3149.95,3329.6 3142.95,3326.04 3142.95,3318.16
  region net PB8: 3102.45,3337.5 3102.45,3352.5 3095.45,3348.94 3095.45,3341.06
  region net PB9: 3077.78,3376.59 3077.33,3361.6 3070.44,3365.36 3070.67,3373.24
  region net BOOT0: 3283.62,2874.07 3268.68,2872.75 3273.77,2866.17 3279.77,2866.7
  region net PA14/SWCLK: 3306.77,2944.06 3291.78,2944.72 3295.97,2937.53 3301.97,2937.27
  region net PA13/SWDIO: 3332.8,2964.78 3317.82,2964.01 3322.67,2957.25 3328.67,2957.56
  region net P04/BLE_MOSI: 3384.17,3129.19 3399.17,3129.19 3394.67,3122.19 3388.67,3122.19
  region net P05/BLE_MISO: 3406.47,3148.79 3421.47,3148.79 3416.97,3141.79 3410.97,3141.79
  region net P06/BLE_SCK: 3434.45,3183.23 3423.84,3172.62 3431.97,3170.85 3436.22,3175.09
  region net P07/BLE_NSS: 3452.37,3174.79 3467.37,3174.79 3462.87,3167.79 3456.87,3167.79
  region net BOOT0: 3269.27,2262.61 3284.27,2262.61 3279.77,2269.61 3273.77,2269.61
  region net PA14/SWCLK: 3291.47,2210.31 3306.47,2210.31 3301.97,2217.31 3295.97,2217.31
  region net PA1: 3451.27,2171.59 3466.27,2171.59 3462.77,2164.59 3454.77,2164.59
  region net PA13/SWDIO: 3318.17,2237.11 3333.17,2237.11 3328.67,2244.11 3322.67,2244.11
  region net USB+: 1928.32,4128.02 1915.59,4140.75 1912.48,4131.98 1919.55,4124.91
  region net USB-: 1995.54,4140.75 1982.82,4128.02 1991.58,4124.91 1998.65,4131.98
  region net M-USB_D+: 1928.32,4005.02 1915.59,4017.75 1913.89,4007.57 1918.14,4003.33
  region net M-USB_D-: 1928.92,3967.02 1916.19,3979.75 1914.49,3969.57 1918.74,3965.33
  region net PA12*: 2892.63,3902 2892.63,3920 2884.23,3914 2884.23,3908
  region net P31: 3511.25,3559.63 3500.64,3549.02 3508.77,3547.25 3513.02,3551.49
  region net BLE_NRST: 3548.07,3553.39 3563.07,3553.39 3558.57,3546.39 3552.57,3546.39
  region net P17/BLE_RX2: 3571.07,3531.39 3586.07,3531.39 3581.57,3524.39 3575.57,3524.39
  region net P16/BLE_TX2: 3595.07,3508.39 3610.07,3508.39 3605.57,3501.39 3599.57,3501.39
  region net MCU_NRST: 2079.22,2062.86 2064.22,2062.97 2067.77,2069.94 2075.77,2069.88
  region net MCU_NRST: 2064.27,2296.39 2079.27,2296.39 2075.77,2289.39 2067.77,2289.39
  region net PA12*: 2675.07,3943.89 2690.07,3943.89 2685.57,3936.89 2679.57,3936.89
  region net P04/BLE_MOSI: 3399.12,2636.36 3384.12,2636.47 3388.67,2643.44 3394.67,2643.39
  region net P05/BLE_MISO: 3421.31,2615.35 3406.31,2615.68 3410.97,2622.58 3416.97,2622.44
  region net P06/BLE_SCK: 3429.77,2592.11 3444.77,2592.11 3440.27,2599.11 3434.27,2599.11
  region net P07/BLE_NSS: 3467.21,2570.35 3452.21,2570.68 3456.87,2577.58 3462.87,2577.44
  region net VCC_1V5: 4132.95,3096.5 4132.95,3111.5 4125.95,3111.5 4125.95,3096.5
  region net M-SWDIO: 2211.95,2670.5 2211.95,2685.5 2204.95,2681 2204.95,2675
  region net M-USB_D+: 2199.49,2846.82 2188.89,2857.43 2187.12,2849.29 2191.36,2845.05
  region net M-USB_D-: 2170.99,2858.02 2160.39,2868.63 2158.62,2860.49 2162.86,2856.25
  region net M-SWCLK: 2300.47,2838.69 2315.47,2838.69 2310.97,2831.69 2304.97,2831.69
  region net USB+: 1930.58,4105.47 1892.52,4128.11 1917.68,4137.19 1926.55,4131.91
  region net USB-: 2014.68,4126.46 1973.68,4109.7 1981.34,4135.16 1991.38,4139.26
  region net M-SWDIO: 1616.63,2751.37 1649.51,2784.25 1650.53,2754.59 1646.29,2750.35
  region net M-SWCLK: 1639.07,2659.06 1639.07,2705.56 1660.77,2685.31 1660.77,2679.31
  region net M-NRST: 1616.63,2613.25 1649.51,2580.37 1650.53,2610.03 1646.29,2614.27
  region net U4_44: 1618.15,3045.74 1655.73,3083.32 1656.6,3049.11 1652.36,3044.87
  region net VDD: 4226.71,1869.49 4260.12,1902.89 4234.9,1908.85 4220.76,1894.71
  region net P16/BLE_TX2: 4181.77,1892.29 4134.52,1892.29 4155.15,1914.34 4161.15,1914.34
  region net P17/BLE_RX2: 4126.71,1769.49 4160.12,1802.89 4129.95,1803.9 4125.71,1799.66
  region net BLE_NRST: 4081.77,1892.29 4034.53,1892.29 4055.15,1914.34 4061.15,1914.34
  region net P14*: 4026.71,1769.49 4060.12,1802.89 4029.95,1803.9 4025.71,1799.66
  region net P31: 3956.17,1902.89 3989.58,1869.49 3990.39,1899.46 3986.15,1903.7
  region net PA3/MCU_RX2: 3581.77,1892.29 3534.53,1892.29 3554.15,1914.34 3562.15,1914.34
  region net PA2/MCU_TX2: 3526.71,1769.49 3560.12,1802.89 3530.65,1804.61 3525,1798.95
  region net PA1: 3434.83,1892.63 3482.07,1891.95 3462.77,1914.28 3454.77,1914.39
  region net VDD: 3556.18,4138.57 3589.59,4171.97 3595.55,4146.75 3581.41,4132.61
  region net VDD: 2755.7,3519.85 2702.58,3521.5 2723.37,3496.04 2733.37,3495.73

## Silkscreen, mask and mechanical layers (free items; w line width, h text height)
Top Overlay:
  circle w6: c4051.37,2810.7 r35.59
  rectangle: 2539.67,2277.9 2549.67,4531.3
  rectangle: 1509.67,2277.8 2543.78,2288.3
  rectangle: 4610.37,3148.6 4943.47,3168.3
  rectangle: 4628.47,3207.7 4943.47,3247
  rectangle: 4746.67,3109.2 4943.47,3128.9
  rectangle: 4746.67,3069.9 4943.47,3089.5
  rectangle: 4746.67,3030.5 4943.47,3050.1
  rectangle: 4746.67,2991.2 4943.57,3010.8
  rectangle: 4746.67,2951.8 4943.47,2971.4
  rectangle: 4746.67,2912.4 4943.47,2932.1
  rectangle: 4923.87,2743.2 4943.47,2931.5
  rectangle: 4746.57,2912.5 4766.37,2971.3
  rectangle: 4923.87,2952.2 4943.57,3010.8
  rectangle: 4746.67,2991.39 4766.47,3050.19
  rectangle: 4923.77,3030.84 4943.57,3089.64
  rectangle: 4746.69,3070.04 4766.49,3128.84
  rectangle: 4923.97,3109.25 4943.67,3247
  text "25" at 4324.07,4446 h36
  text "47" at 3213.67,4442.7 h36
  text "35" at 3819.67,4442.7 h36
  text "NC" at 3274.19,4333.47 h36 r45
  text "AT-Link" at 2173.6,4331.8 h50 r1
  text "P05" at 4268.79,4331.77 h36 r45
  text "P07" at 4374.79,4331.77 h36 r45
  text "PB14" at 4168.09,4330.87 h36 r45
  text "PC14*" at 3369.49,4330.37 h36 r45
  text "PB8" at 3670.79,4330.17 h36 r45
  text "PB7" at 3774.19,4328.47 h36 r45
  text "VDD" at 4067.79,4327.77 h36 r45
  text "PA14" at 3870.49,4327.17 h36 r45
  text "PA12*" at 3968.39,4326.87 h36 r45
  text "GND" at 3569.19,4324.17 h36 r45
  text "VBAT" at 3460.69,4321.07 h36 r45
  text "USB" at 2975.27,4314.8 h55
  text "EZ-V2.0" at 2178.27,4259 h45
  text "5V" at 1701.07,4145.9 h36
  text "GND" at 2399.87,4055.1 h36
  text "GND" at 1697.67,4042.4 h36
  text "PB9" at 3633.29,3997.17 h36 r45
  text "P06" at 4347.39,3992.47 h36 r45
  text "VDD" at 3529.39,3988.07 h36 r45
  text "PC13" at 3412.19,3974.27 h36 r45
  text "PA13" at 3924.39,3974.27 h36 r45
  text "PA11*" at 4011.39,3972.77 h36 r45
  text "PC15*" at 3299.19,3965.07 h36 r45
  text "BOOT0" at 3683.39,3945.07 h36 r45
  text "PB6/PC12" at 3730.84,3878.96 h36 r48
  text "P04/PB13" at 4135.24,3878.56 h36 r48
  text "PB15/PA8" at 4028.94,3877.46 h36 r48
  text "MCU-NRST" at 3107.09,3871.87 h36 r45
  text "IDD" at 2570.87,3527.1 h50
  text "VDD" at 2798.57,2959.3 h36
  text "BOOT0" at 2800.97,2859.6 h36
  text "GND" at 2803.17,2755.8 h36
  text "AT-START-WB415 V1.1" at 2597.27,2241.4 h70
  text "GND" at 4492.71,2109.29 h36
  text "VDD" at 4267.69,1934.57 h36 r45
  text "PC1" at 3282.39,1931.97 h36 r45
  text "PA1" at 3475.59,1931.97 h36 r45
  text "PA3" at 3574.59,1931.57 h36 r45
  text "NC" at 3880.99,1932.07 h36 r45
  text "P31" at 3972.69,1932.07 h36 r45
  text "BLE-NRST" at 4069.69,1931.57 h36 r45
  text "GND" at 4369.69,1931.57 h36 r45
  text "NC" at 3779.69,1931.37 h36 r45
  text "P16" at 4171.09,1931.47 h36 r45
  text "PA5" at 3673.29,1929.97 h36 r45
  text "VDDA" at 3369.29,1922.17 h36 r45
  text "NC" at 4345.09,1616.97 h36 r45
  text "NC" at 3754.59,1614.27 h36 r45
  text "NC" at 3856.59,1614.27 h36 r45
  text "NC" at 3956.59,1614.27 h36 r45
  text "NC" at 4250.59,1613.27 h36 r45
  text "BLE" at 2271.57,1607.3 h56
  text "MCU" at 1756.37,1602.1 h56
  text "P17" at 4147.09,1598.27 h36 r45
  text "P14*" at 4039.62,1595.23 h36 r45
  text "GND" at 3328.59,1592.57 h36 r45
  text "PA0" at 3432.59,1592.77 h36 r45
  text "PA4" at 3633.99,1592.87 h36 r45
  text "PC0" at 3232.49,1591.87 h36 r45
  text "PA2" at 3531.59,1589.87 h36 r45
  text "1" at 3242.65,1559.14 h36 r180
  text "USER" at 2779.57,1540 h56
  text "23" at 4333.87,1526.7 h36
  text "13" at 3829.67,1524 h36
  text "Reset" at 2271.57,1520.6 h56
  text "Reset" at 1752.75,1516.56 h56
Bottom Overlay:
  text "33" at 4008.29,4359.17 h36 r45
  text "29" at 4203.19,4358.67 h36 r45
  text "25" at 4408.29,4359.07 h36 r45
  text "43" at 3502.67,4357.72 h36 r45
  text "35" at 3907.39,4357.67 h36 r45
  text "39" at 3704.39,4357.27 h36 r45
  text "45" at 3403.97,4356.36 h36 r45
  text "NC" at 3300.36,4353.65 h36 r45
  text "41" at 3602.29,4353.67 h36 r45
  text "31" at 4100.09,4353.57 h36 r45
  text "37" at 3804.99,4351.57 h36 r45
  text "27" at 4302.59,4352.17 h36 r45
  text "40" at 3694.9,4074.42 h36 r45
  text "28" at 4300.3,4074.42 h36 r45
  text "46" at 3391.99,4073.27 h36 r45
  text "44" at 3492.49,4073.27 h36 r45
  text "42" at 3596.3,4073.12 h36 r45
  text "48" at 3295.79,4072.07 h36 r45
  text "26" at 4399.59,4072.17 h36 r45
  text "30" at 4201.09,4070.87 h36 r45
  text "34" at 3999.59,4070.17 h36 r45
  text "32" at 4101.69,4070.17 h36 r45
  text "38" at 3797.69,4069.47 h36 r45
  text "36" at 3900.49,4068.07 h36 r45
  text "3V3" at 1796.37,3145.1 h36
  text "M-BOOT0" at 1942.37,3039.1 h36
  text "3V3" at 1805.47,2839.2 h36
  text "M-SWDIO" at 1934.97,2741 h36
  text "M-SWCLK" at 1954.67,2638.3 h36
  text "M-NRST" at 1910.77,2538.8 h36
  text "GND" at 1800.67,2440.7 h36
  text "AT32WB415CCU7-7" at 3745.47,2111.2 h100
  text "NC" at 3910.29,1954.47 h36 r45
  text "22" at 4318.09,1954.27 h36 r45
  text "24" at 4414.19,1951.67 h36 r45
  text "20" at 4209.99,1948.47 h36 r45
  text "12" at 3799.89,1944.57 h36 r45
  text "4" at 3399.97,1943.21 h36 r81
  text "18" at 4099.09,1942.97 h36 r45
  text "10" at 3699.09,1939.37 h36 r45
  text "16" at 3998.89,1938.17 h36 r45
  text "2" at 3288.29,1934.87 h36 r45
  text "6" at 3492.44,1930.61 h36 r40
  text "8" at 3593.23,1930.61 h36 r45
  text "NC" at 3895.89,1676.97 h36 r45
  text "NC" at 3998.61,1677.3 h36 r45
  text "17" at 4098.61,1677.3 h36 r45
  text "19" at 4197.21,1677.3 h36 r45
  text "NC" at 4298.61,1677.3 h36 r45
  text "NC" at 4402.79,1676.77 h36 r45
  text "NC" at 3797.19,1675.77 h36 r45
  text "9" at 3691.04,1675.21 h36 r40
  text "5" at 3487.91,1673.3 h36 r45
  text "3" at 3388.99,1668.97 h36 r45
  text "1" at 3286.99,1663.97 h36 r45
  text "7" at 3600.53,1663.78 h36 r34
Top Solder:
  rectangle: 4517.57,3190.75 4556.57,3230.45

## Text inside footprints (layer, text, board x,y; h text height)
ANT1: Top Overlay "ANT" at 4762.83,2792.06 h51.18